# Altium PCB V_18.PcbDoc
Units mm, origin at the board's own origin, x right, y up, seen from the top; angles counter-clockwise.
Board outline 152.4 x 101.6 mm, 2 copper layers (Top Layer, Bottom Layer); 6 components, 9 nets, 77 pads, 5 vias.
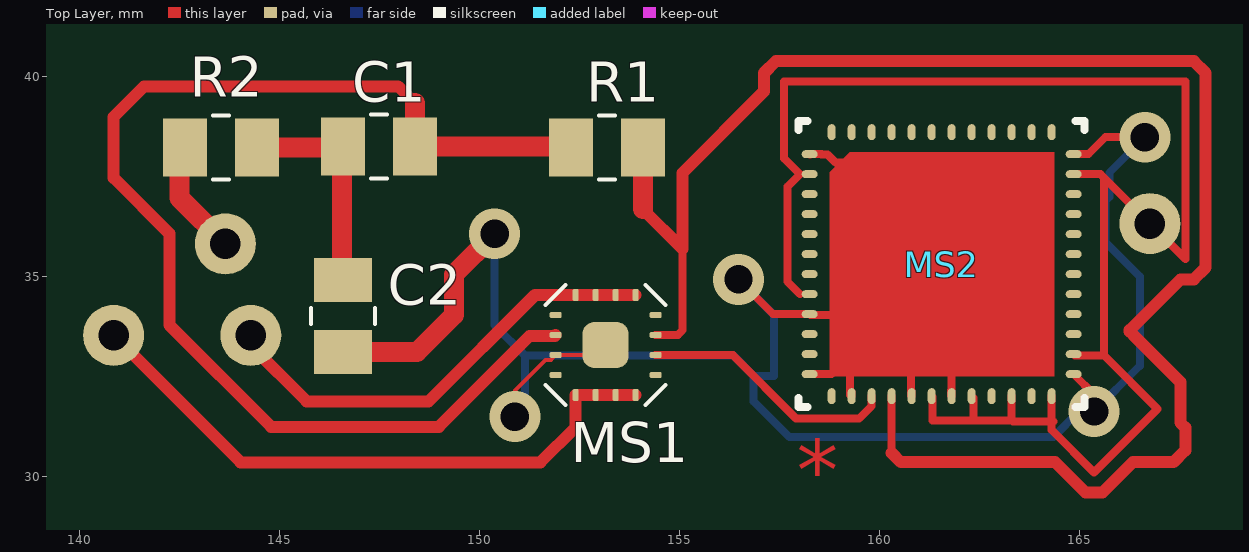
[diagram p0: Top Layer view]
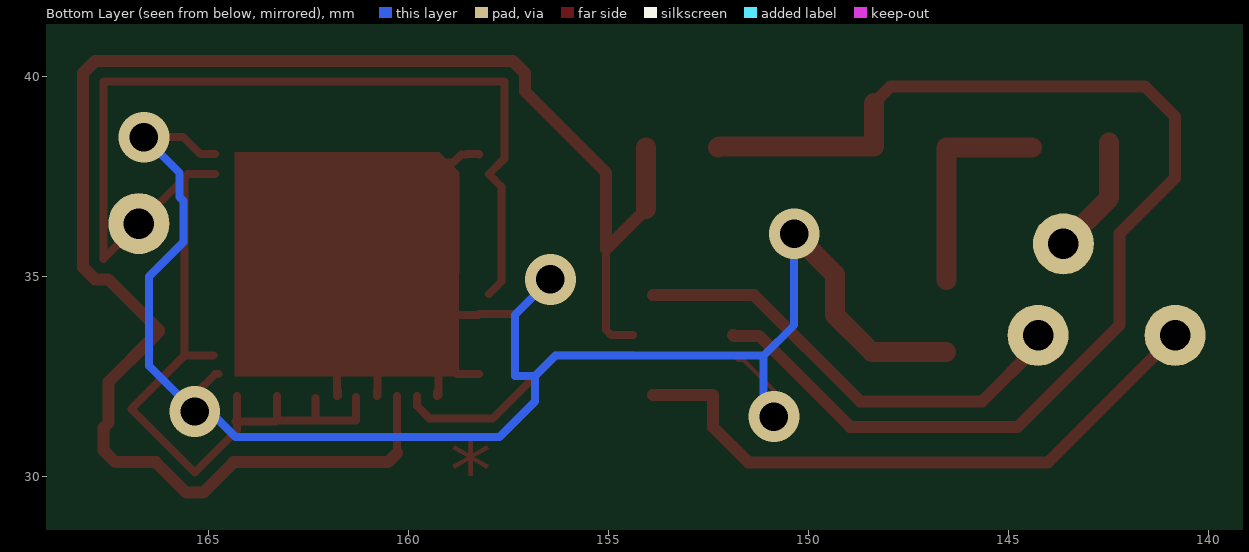
[diagram p1: Bottom Layer view, seen from below]

## Layer stack, top to bottom
Top Layer: signal copper 0.0356
Dielectric: dielectric 0.32, FR-4, Dk 4.8
Bottom Layer: signal copper 0.0356

## Board outline
25.4,25.4 177.8,25.4 177.8,127 25.4,127

## Design rules (kind name [scope] priority, off if disabled: settings)
Clearance [All] p1: gap=0.254
PolygonConnect [All] p1: connectstyle=Relief reliefconductorwidth=0.254 reliefentries=4 polygonreliefangle="90 Angle"
RoomDefinition V_18 [InComponentClass('V_18')] p1: confinementstyle=ConfineIn formatcopy=TRUE lockcomponents=FALSE outline 139.192,29.845 170.18,29.845 170.18,40.513 139.192,40.513
RoutingVias [All] p1: holewidth=0.711 width=1.27 viastyle="Through Hole" minholewidth=0.711 minwidth=1.27 maxholewidth=0.711 maxwidth=1.27
SilkscreenOverComponentPads [All] p1: minsilkscreentomaskgap=0.254
SolderMaskExpansion [All] p1: expansion=0.102
Width [All] p1: maxlimit=0.5 minlimit=0.1 preferedwidth=0.254
27 further rules are at their usual default settings.

## Components (designator, comment, footprint, x,y, rotation, side; value= is the part's Value field where it differs from the comment)
C1 "Value" Ñ1 147.574,37.846 r180 top
C2 "Value" Ñ1 146.177,33.909 r90 top
MS1 "*" ADA4932 151.892,34.036 r0 top
MS2 "*" ADS61B49 161.544,35.306 r0 top net-tie
R1 "*" Res0805 152.273,38.227 r0 top
R2 "*" Res0805 142.621,38.227 r0 top

## Footprints (in the part's own frame and the unit in brackets; to place one, negate y for a bottom-side part, rotate by r counter-clockwise, add the part's x,y. Pads: shape width x height; smd on the part's side, far side on the other; paste and mask are expansions set on the pad)
ADA4932 [mm]
  rrect50% 0.3x0.15 smd: 1(0,0) 2(0,-0.5) 3(0,-1) 4(0,-1.5) 9(2.5,-1.5) 10(2.5,-1) 11(2.5,-0.5) 12(2.5,0)
  rrect50% 0.15x0.3 smd: 5(0.5,-2) 6(1,-2) 7(1.5,-2) 8(2,-2) 13(2,0.5) 14(1.5,0.5) 15(1,0.5) 16(0.5,0.5)
  rrect50% 1.15x1.15 smd: 17(1.25,-0.75)
  silkscreen extent -0.25,-2.25 2.75,0.75
ADS61B49 [mm]
  oval 0.4x0.2 smd: 1(-3.3,2.75) 2(-3.3,2.25) 3(-3.3,1.75) 4(-3.3,1.25) 5(-3.3,0.75) 6(-3.3,0.25) 7(-3.3,-0.25) 8(-3.3,-0.75) 9(-3.3,-1.25) 10(-3.3,-1.75) 11(-3.3,-2.25) 12(-3.3,-2.75) 25(3.3,-2.75) 26(3.3,-2.25) 27(3.3,-1.75) 28(3.3,-1.25) 29(3.3,-0.75) 30(3.3,-0.25) 31(3.3,0.25) 32(3.3,0.75) 33(3.3,1.25) 34(3.3,1.75) 35(3.3,2.25) 36(3.3,2.75)
  oval 0.2x0.4 smd: 13(-2.75,-3.3) 14(-2.25,-3.3) 15(-1.75,-3.3) 16(-1.25,-3.3) 17(-0.75,-3.3) 18(-0.25,-3.3) 19(0.25,-3.3) 20(0.75,-3.3) 21(1.25,-3.3) 22(1.75,-3.3) 23(2.25,-3.3) 24(2.75,-3.3) 37(2.75,3.3) 38(2.25,3.3) 39(1.75,3.3) 40(1.25,3.3) 41(0.75,3.3) 42(0.25,3.3) 43(-0.25,3.3) 44(-0.75,3.3) 45(-1.25,3.3) 46(-1.75,3.3) 47(-2.25,3.3) 48(-2.75,3.3)
  Top Layer region: -2.796,-2.805 -2.801,2.3 -2.304,2.799 2.804,2.801 2.81,-2.8
  silkscreen extent -3.57,-3.57 3.58,3.58
Res0805 [mm]
  rect 1.1x1.45 smd: 1(0,0) 2(1.8,0)
  silkscreen extent 0.7,-0.8 1.1,0.8
Ñ1 [mm]
  rect 1.1x1.45 smd: 53(1,-0.4) 54(-0.8,-0.4)
  silkscreen extent -0.1,-1.2 0.3,0.4

## Part data
C1 C2: library part Ñ1
MS1: library part ADA4932
MS2: library part ADS61B49
R1 R2: library part Res

## Free pads (board coordinates)
  round 1.524 hole 0.762: 0(144.272,33.528) 1(140.843,33.528) 2(166.751,36.322) 3(143.637,35.814)

## Via types
v1: diameter 1.27, hole 0.711, Top Layer to Bottom Layer, 5 vias

## Nets (pads, with @x,y where several pads share a name; then routed paths per layer and width w, separated by ;. In a path a pad name is that pad's centre, name@x,y a point inside that pad or via, vN(x,y) a via of type N, cw(c..) or ccw(c..) an arc to the next point about the centre after c; other vN are vias at no path point)
+3.3V: MS2.2 MS2.8 MS2.18 MS2.20 MS2.22 MS2.24 MS2.26 MS2.35 pad.2 | length 40.3
  Top Layer w0.2: 158.002,34.556 157.69,34.868 157.69,37.244 157.956,37.51 158.002,37.556 157.607,37.951 157.607,39.878 167.64,39.878 167.64,35.433 165.517,37.556 MS2.35 ; MS2.18@161.318,31.982 161.318,31.397 162.334,31.397 ; MS2.20@162.334,31.966 162.334,31.397 ; MS2.22 163.294,31.397 ; MS2.24 164.294,31.159 165.354,30.099 166.941,31.686 165.608,33.02 ; 164.338,31.369 163.322,31.369 163.294,31.397 ; MS2.26@164.88,33.02 165.608,33.02 ; 165.608,37.465 165.608,33.02 ; 162.334,31.397 163.294,31.397
+5V: MS1.5 MS1.6 MS1.7 MS1.8 pad.1 | length 15.5
  Top Layer w0.3: pad.1 144.018,30.353 151.511,30.353 152.392,31.234 MS1.5 MS1.6 MS1.7 MS1.8
-5V: MS1.13 MS1.14 MS1.15 MS1.16 pad.0 | length 11.6
  Top Layer w0.3: pad.0@144.018,33.274 144.272,33.274 145.669,31.877 148.717,31.877 151.376,34.536 MS1.16 MS1.15 MS1.14 MS1.13
GND: C2.54 MS1.3 MS1.17 MS2.1 MS2.9 MS2.12 MS2.14 MS2.17 MS2.19 MS2.25 MS2.36 | length 61.5
  Top Layer w0.1: v1(150.876,31.496) 150.876,32.153 151.638,32.915 151.771,32.915 MS1.3 MS1.17@152.892,33.036
  Top Layer w0.2: v1(156.464,34.925) 157.333,34.056 MS2.9 ; MS2.12 158.794,32.556 159.258,33.02 ; MS2.1@158.248,38.052 MS2.1 158.54,38.056 158.544,38.052 158.686,38.052 158.892,37.846 159.385,37.846 159.258,37.719 159.258,37.592 159.131,37.592 ; MS2.9@158.264,34.036 159.258,34.036 ; 159.117,37.606 159.131,37.592 ; MS2.14@159.258,32.042 MS2.14@159.258,32.147 ; MS2.14 159.294,32.111 MS2.14@159.258,32.147 ; MS2.17@160.782,32.018 160.782,33.655 ; MS2.17 MS2.17@160.794,32.135 ; MS2.19@161.772,32.147 161.772,32.028 MS2.19 161.794,33.151 161.29,33.655 160.782,33.655 ; MS2.25@164.758,32.556 MS2.25 165.354,32.046 v1(165.354,31.623) ; MS2.36 165.21,38.056 165.635,38.481 v1(166.624,38.481) ; 159.131,37.592 159.258,37.465 159.258,34.036 ; MS2.14@159.258,32.147 159.258,33.02 ; 159.258,33.02 159.258,33.655 ; 159.258,33.655 160.782,33.655 ; 159.258,33.655 159.258,34.036
  Top Layer w0.5: C2.54 148.425,33.109 149.352,34.036 149.352,35.052 v1(150.368,36.068)
  Bottom Layer w0.2: v1(150.368,36.068) 150.368,33.782 151.13,33.02 ; v1(150.876,31.496) 151.13,31.75 151.13,33.02 ; v1(156.464,34.925) 157.353,34.036 157.353,32.512 156.845,32.512 ; v1(166.624,38.481) 165.735,37.592 165.735,36.984 165.635,36.884 165.635,35.86 166.497,34.998 166.497,32.766 v1(165.354,31.623) 164.973,31.623 164.338,30.988 157.734,30.988 156.845,31.877 156.845,32.512 ; 151.13,33.02 156.337,33.02 156.845,32.512
NetC1_53: C1.53 C2.53 R2.2 | length 5.5
  Top Layer w0.5: R2.2 146.555,38.227 C2.53@146.555,34.909
NetC1_54: C1.54 MS1.2 R1.1 | length 30.5
  Top Layer w0.3: 148.374,39.332 147.955,39.751 141.605,39.751 140.843,38.989 140.843,37.465 142.24,36.068 142.24,33.782 144.78,31.242 148.971,31.242 151.244,33.515 151.871,33.515 MS1.2
  Top Layer w0.5: 148.374,39.332 C1.54 152.254,38.246 R1.1
NetMS1_10: MS1.10 MS2.15 | length 6.4
  Top Layer w0.2: MS1.10 154.396,33.032 156.325,33.032 157.905,31.452 159.482,31.452 159.794,31.764 MS2.15
NetMS1_11: MS1.11 MS2.16 R1.2 | length 42.8
  Top Layer w0.2: MS1.11 154.948,33.536 155.067,33.655 155.067,35.687 ; 160.294,30.587 MS2.16
  Top Layer w0.3: 154.073,36.681 155.067,35.687 155.067,37.592 157.103,39.628 157.103,40.087 157.398,40.382 167.849,40.382 168.144,40.087 168.144,35.224 167.849,34.929 167.517,34.929 166.243,33.655 166.243,33.628 166.396,33.475 167.513,32.358 167.513,31.346 167.509,31.346 167.636,31.219 167.636,30.652 167.341,30.357 166.325,30.357 165.563,29.595 165.145,29.595 164.383,30.357 160.524,30.357 160.294,30.587
  Top Layer w0.5: 154.073,36.681 R1.2
NetR2_1: pad.3 R2.1 | length 3.5
  Top Layer w0.5: R2.1@142.494,38.354 142.494,36.957 pad.3 pad.3@144.145,35.814
pads on no net: MS1.1 MS1.4 MS1.9 MS1.12 MS2.3 MS2.4 MS2.5 MS2.6 MS2.7 MS2.10 MS2.11 MS2.13 MS2.21 MS2.23 MS2.27 MS2.28 MS2.29 MS2.30 MS2.31 MS2.32 MS2.33 MS2.34 MS2.37 MS2.38 MS2.39 MS2.40 MS2.41 MS2.42 MS2.43 MS2.44 MS2.45 MS2.46 MS2.47 MS2.48

## Other copper
Top Layer:
  rectangle: 164.348,32.506 164.354,38.107